# EAGLE board greenhousectrl-latest-expanded (EAGLE 7.7.0)
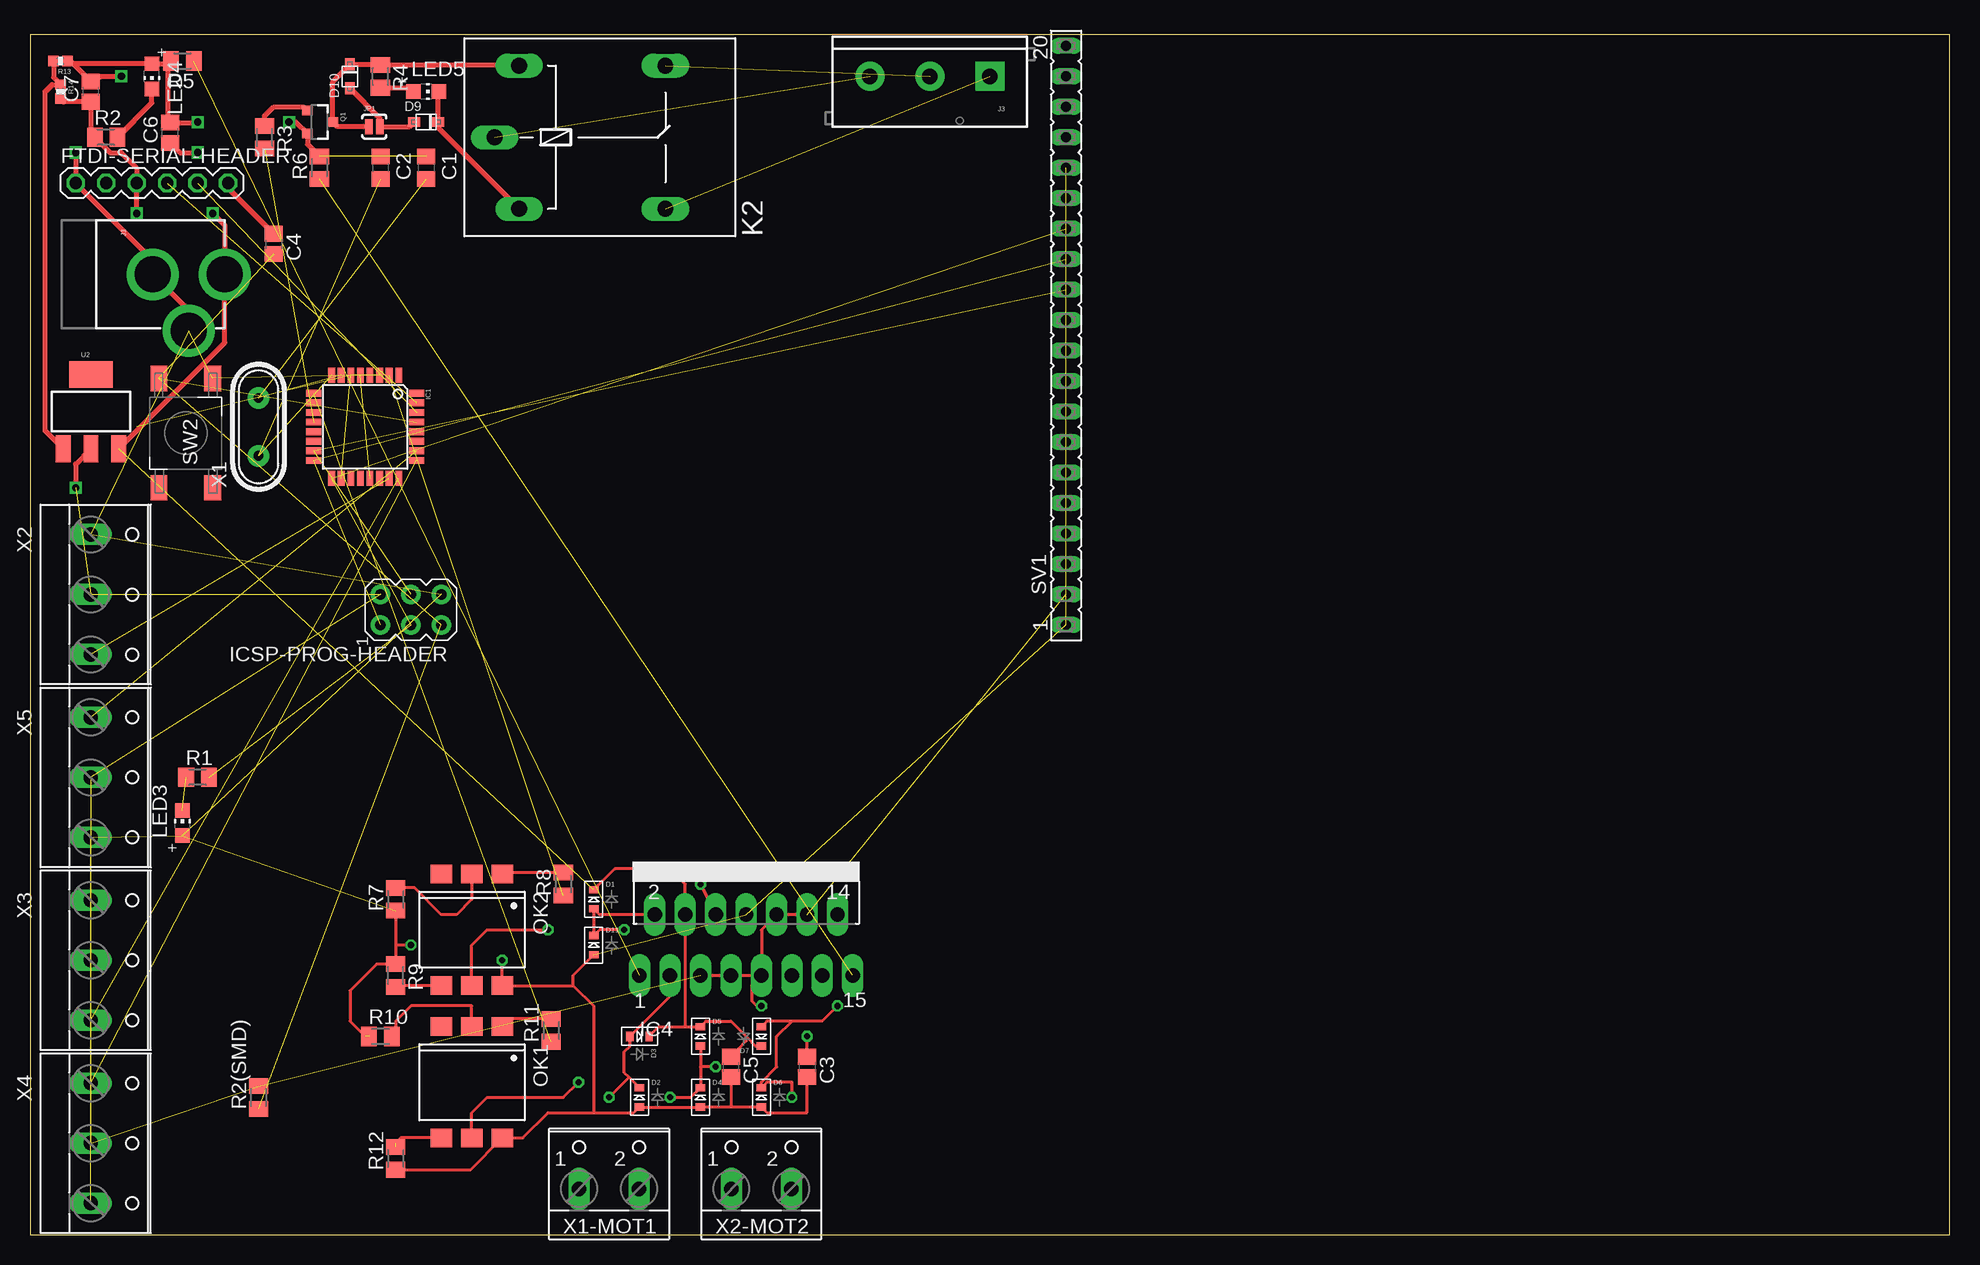
[diagram p0: board, top side]
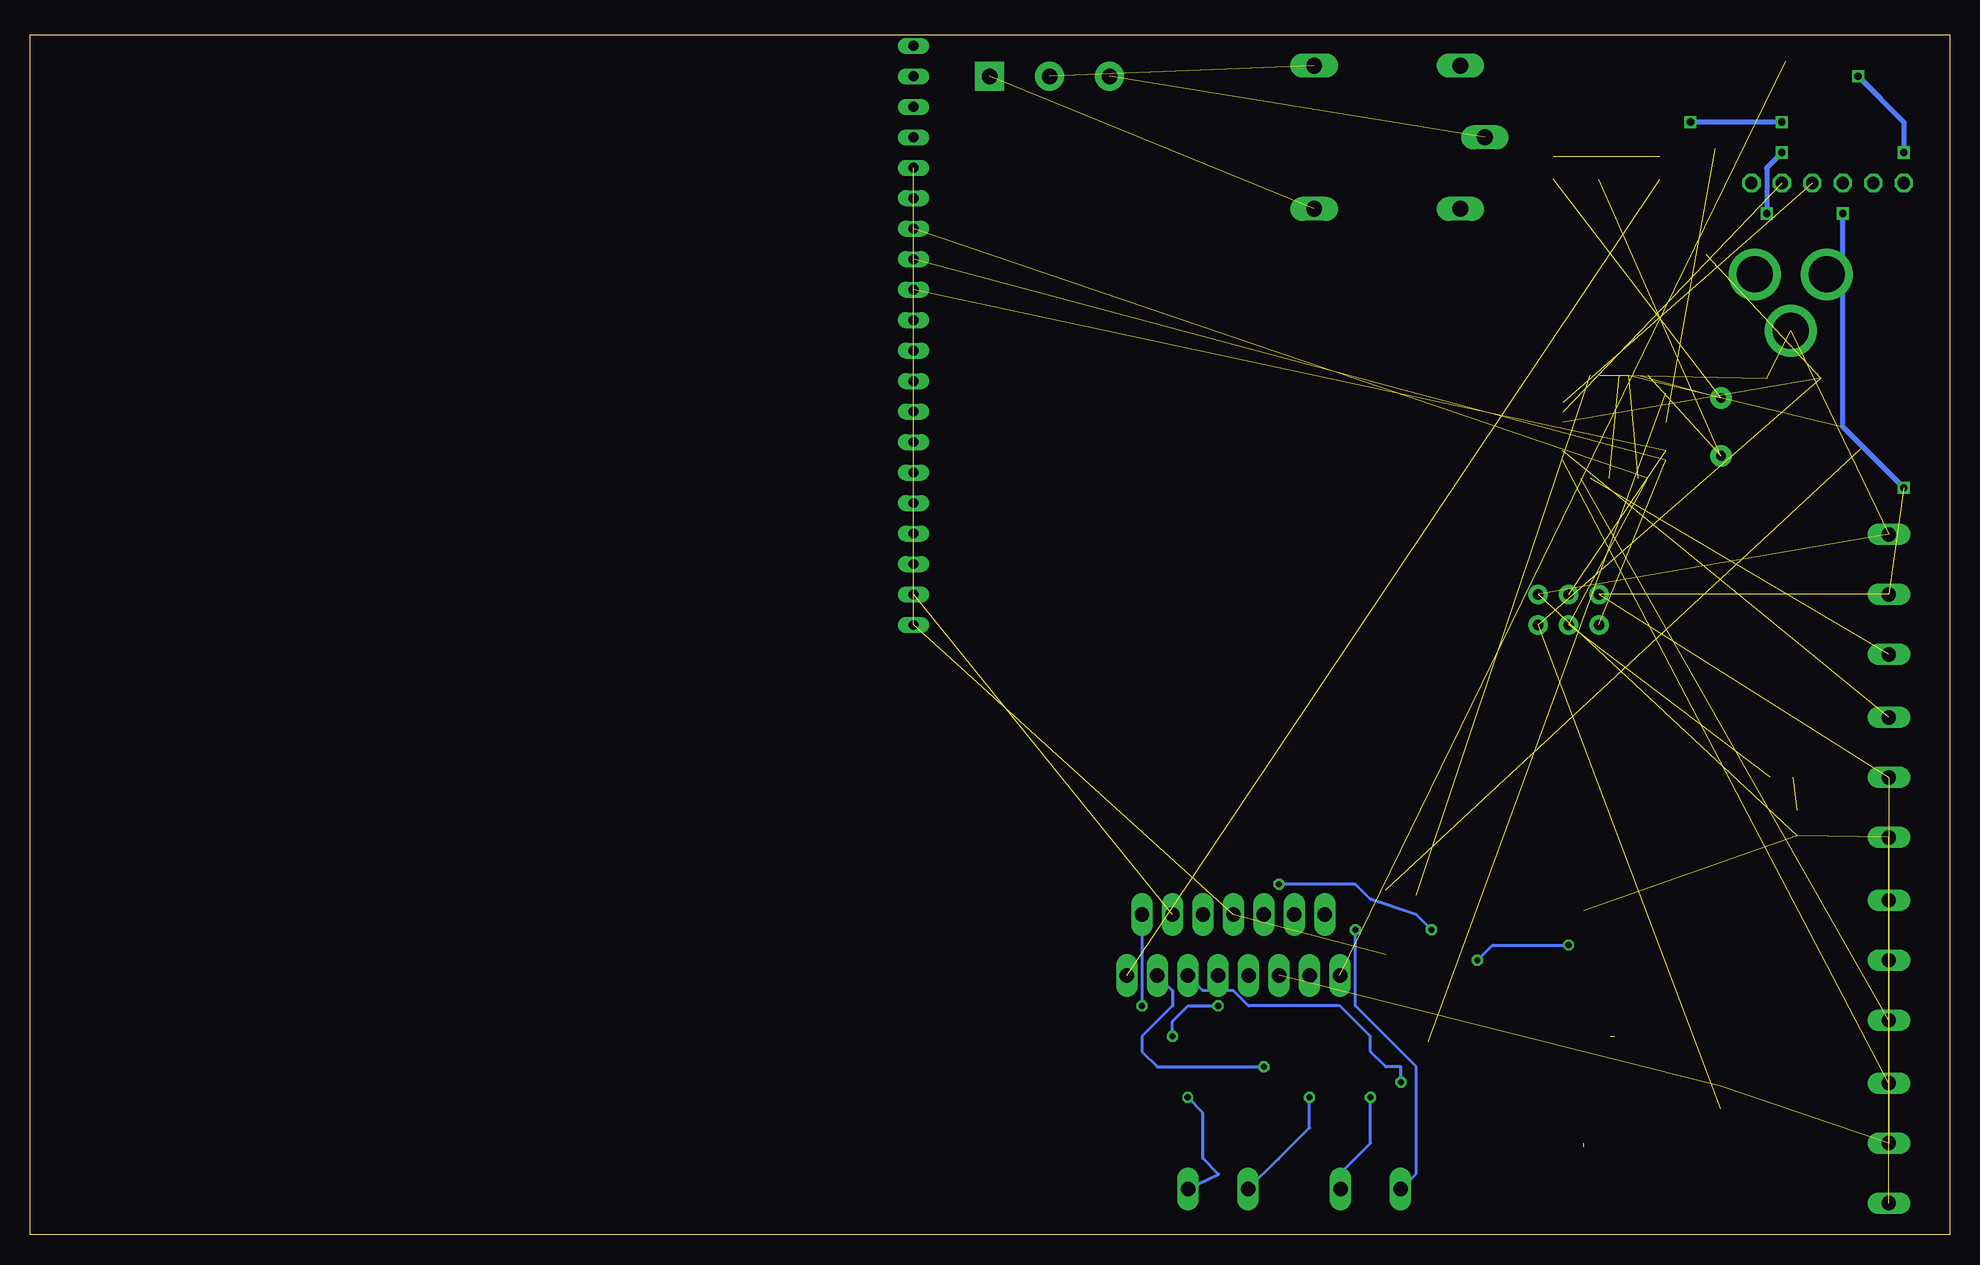
[diagram p1: board, bottom side, seen from below]

Size 160 x 100 mm. Coordinates in mm from the lower left corner, seen from the top.
Outline: 0,0 160,0 160,100 0,100 0,0
Copper layers (1*16): Top 0.035mm / dielectric 1.5mm / Bottom 0.035mm
Design rules "default": minimum track width 10mil, minimum drill 24mil, track to track 8mil, track to pad 8mil, pad to pad 8mil, via to via 8mil, smd to smd 8mil, copper to edge 40mil, drill to drill 8mil, minimum pad ring 10mil, minimum via ring 8mil, stop-mask expansion 4mil, vias tented up to drill 0mil, thermal gap 10mil

## Footprints (pad centres in the part's own frame; a part is rotated, then mirrored left to right if it is on the bottom)
C0805 = smd 1.3 x 1.5: 1 -0.95,0; 2 0.95,0
C0805' = smd 1.3 x 1.5: 1 -0.85,0; 2 0.85,0
SOD-523 = smd 0.8 x 0.6: A 0,-0.8; K 0,0.8
SOD-323F = smd 1 x 0.8: A -1,0; C 1,0
06X1-PTH = drill 1.016 octagon: 1 -6.35,0; 2 -3.81,0; 3 -1.27,0; 4 1.27,0; 5 3.81,0; 6 6.35,0
TQFP32-08 = smd 1.27 x 0.559: 1 -4.293,2.8; 2 -4.293,2; 3 -4.293,1.2; 4 -4.293,0.4; 5 -4.293,-0.4; 6 -4.293,-1.2; 7 -4.293,-2; 8 -4.293,-2.8; 17 4.293,-2.8; 18 4.293,-2; 19 4.293,-1.2; 20 4.293,-0.4; 21 4.293,0.4; 22 4.293,1.2; 23 4.293,2; 24 4.293,2.8 | smd 0.559 x 1.27: 9 -2.8,-4.293; 10 -2,-4.293; 11 -1.2,-4.293; 12 -0.4,-4.293; 13 0.4,-4.293; 14 1.2,-4.293; 15 2,-4.293; 16 2.8,-4.293; 25 2.8,4.293; 26 2,4.293; 27 1.2,4.293; 28 0.4,4.293; 29 -0.4,4.293; 30 -1.2,4.293; 31 -2,4.293; 32 -2.8,4.293
MULTIWATT-15 = drill 1.2 long: 1 -8.89,-7.62; 2 -7.62,-2.54; 3 -6.35,-7.62; 4 -5.08,-2.54; 5 -3.81,-7.62; 6 -2.54,-2.54; 7 -1.27,-7.62; 8 0,-2.54; 9 1.27,-7.62; 10 2.54,-2.54; 11 3.81,-7.62; 12 5.08,-2.54; 13 6.35,-7.62; 14 7.62,-2.54; 15 8.89,-7.62
AVRISP = drill 0.9 pad 1.626: 1 -1.27,2.54; 2 1.27,2.54; 3 -1.27,0; 4 1.27,0; 5 -1.27,-2.54; 6 1.27,-2.54
POWER_JACK_PTH = drill 2.997 pad 4.318: GND 0,7.7; GNDBREAK 4.7,10.7; PWR 0,13.7
SCREWTERMINAL-5MM-3 = drill 1.3 pad 2.413 square: 1 0,0 | drill 1.3 pad 2.413: 2 5,0; 3 10,0
PAD-JUMPER-2-NO_YES_SILK = smd 0.635 x 1.27: 1 -0.45,0; 2 0.45,0
G5LE = drill 1.321 long: 1 -7.493,-5.969; 2 -7.493,5.969; O 4.699,5.969; P -9.525,0; S 4.699,-5.969
CHIP-LED0805 = smd 1.2 x 1.2: A 0,-1.05; C 0,1.05
DIL6-SMD = smd 1.78 x 1.52: 1 -2.54,-4.645; 2 0,-4.645; 3 2.54,-4.645; 4 2.54,4.645; 5 0,4.645; 6 -2.54,4.645
SOT23-3 = smd 0.8 x 0.9: 1 -0.95,-1; 2 0.95,-1; 3 0,1.1
M0805 = smd 1.3 x 1.6: 1 -0.95,0; 2 0.95,0
0402-RES = smd 0.85 x 0.9: 1 -0.58,0; 2 0.58,0
FE20 = drill 0.813 long: 1 -24.13,0; 2 -21.59,0; 3 -19.05,0; 4 -16.51,0; 5 -13.97,0; 6 -11.43,0; 7 -8.89,0; 8 -6.35,0; 9 -3.81,0; 10 -1.27,0; 11 1.27,0; 12 3.81,0; 13 6.35,0; 14 8.89,0; 15 11.43,0; 16 13.97,0; 17 16.51,0; 18 19.05,0; 19 21.59,0; 20 24.13,0
SPST_NO_SMD = smd 2.108 x 1.397: 1 0,4.496; 2 9.119,4.496; 3 0,0; 4 9.119,0
SOT223 = smd 1.219 x 2.235: 1 -2.311,-3.099; 2 0,-3.099; 3 2.311,-3.099 | smd 3.6 x 2.2: 4 0,3.099
HC49 = drill 0.813 pad 1.8: 1 -2.413,0; 2 2.413,0
W237-102 = drill 1.194 long: 1 -2.5,-1.27; 2 2.5,-1.27
W237-103 = drill 1.194 long: 1 -5,-1.29; 2 0,-1.29; 3 5,-1.29

## Placement (x,y rotation side)
C1  [C0805]  33.02,88.9 270 top
C2  [C0805]  29.21,88.9 270 top
C3  1.0uF  [C0805']  64.77,13.97 270 top
C4  0.1uF  [C0805']  20.32,82.55 270 top
C5  1.0uF  [C0805']  58.42,13.97 270 top
C6  0.1uF  [C0805']  11.68,91.82 90 top
C7  0.1uF  [C0805']  5.08,95.25 90 top
D1  [SOD-523]  46.99,27.94 0 top
D2  [SOD-523]  50.8,11.43 0 top
D3  [SOD-523]  50.8,16.51 270 top
D4  [SOD-523]  55.88,11.43 0 top
D5  [SOD-523]  55.88,16.51 0 top
D6  [SOD-523]  60.96,11.43 0 top
D7  [SOD-523]  60.96,16.51 180 top
D9  1N4148  [SOD-323F]  33.02,92.71 0 top
D10  Zener  [SOD-323F]  26.67,96.52 90 top
D11  [SOD-523]  46.99,24.13 0 top
FTDI-SERIAL-HEADER  HEADER-06X1-MALE  [06X1-PTH]  10.16,87.63 0 top
IC1  ATMEGA168TQFP-08  [TQFP32-08]  27.94,67.31 270 top
IC4  L298  [MULTIWATT-15]  59.69,29.21 0 top
ICSP-PROG-HEADER  AVRISP-6  [AVRISP]  31.75,52.07 90 top
J1  POWER_JACKPTH  [POWER_JACK_PTH]  2.54,80.01 270 top
J3  [SCREWTERMINAL-5MM-3]  80.01,96.52 180 top
JP1  JUMPER-PAD-2-NOYES_SILK  [PAD-JUMPER-2-NO_YES_SILK]  28.7,92.33 0 top
K2  G5LE  [G5LE]  48.26,91.44 0 top
LED3  [CHIP-LED0805]  12.7,34.29 0 top
LED4  [CHIP-LED0805]  10.16,96.52 180 top
LED5  [CHIP-LED0805]  33.02,95.25 270 top
OK1  4N27SM  [DIL6-SMD]  36.83,12.7 180 top
OK2  4N27SM  [DIL6-SMD]  36.83,25.4 180 top
Q1  MMBT2222A  [SOT23-3]  24.13,92.71 270 top
R1  [M0805]  13.97,38.1 0 top
R2  [M0805]  6.35,91.44 0 top
R2(SMD)  [M0805]  19.05,11.43 90 top
R3  1K  [M0805]  19.56,91.44 270 top
R4  1K  [M0805]  29.21,96.52 270 top
R5  [M0805]  12.7,97.79 180 top
R6  [M0805]  24.13,88.9 90 top
R7  [M0805]  30.48,27.94 90 top
R8  [M0805]  44.45,29.21 90 top
R9  [M0805]  30.48,21.59 270 top
R10  [M0805]  29.21,16.51 0 top
R11  [M0805]  43.43,17.02 90 top
R12  [M0805]  30.48,6.35 90 top
R13  [0402-RES]  2.54,97.79 180 top
R14  [0402-RES]  2.54,95.25 270 top
SV1  [FE20]  86.36,74.93 90 top
SW2  MOMENTARYBUTTON  [SPST_NO_SMD]  15.24,62.23 90 top
U2  V_REG_317SMD  [SOT223]  5.08,68.58 0 top
X1  CRYSTALS-NOGND-HC49  [HC49]  19.05,67.31 90 top
X1-MOT1  [W237-102]  48.26,5.08 0 top
X2  [W237-103]  6.35,53.34 270 top
X2-MOT2  [W237-102]  60.96,5.08 0 top
X3  [W237-103]  6.35,22.86 270 top
X4  [W237-103]  6.35,7.62 270 top
X5  [W237-103]  6.35,38.1 270 top

## Library data of the parts
C1 C2 = resistor
C3-C7 D1-D7 D10 D11 ICSP-PROG-HEADER LED3-LED5 R1 R2 R2(SMD) R3-R12 = adafruit
D9 = adafruit; PROD_ID: DIO-08378
FTDI-SERIAL-HEADER = GeekAmmo; OTHER: 4UCON 00834; URL: http://www.4uconnector.com/online/SearchPro.asp?FormName=ProSearch&FormAction=search&s_GroupNo=&s_keyword=00834
IC1 = atmega328p
IC4 = st-microelectronics; MPN: L298N; OC_FARNELL: 1589425; OC_NEWARK: 32M1527
J1 = SparkFun-Connectors; PROD_ID: CONN-08197
J3 = SparkFun-Connectors; PROD_ID: CONN-10134; STOREFRONT_ID: PRT-08433
JP1 = SparkFun-Passives
K2 = relay; OC_FARNELL: unknown; OC_NEWARK: unknown
OK1 OK2 = optocoupler; MF: FAIRCHILD SEMICONDUCTOR; MPN: 4N27S-M; OC_FARNELL: unknown; OC_NEWARK: 05C3300
Q1 = SparkFun-DiscreteSemi; PROD_ID: TRANS-08049
R13 R14 = SparkFun-Resistors
SV1 = con-lsta; OC_FARNELL: unknown; OC_NEWARK: unknown
SW2 = ece388
U2 = SparkFun-PowerIC
X1 = IQD-Frequency-Products
X1-MOT1 X2-MOT2 = con-wago-500; MPN: 237-102; OC_FARNELL: unknown; OC_NEWARK: 70K9898
X2-X5 = ece388; MPN: 237-103; OC_FARNELL: unknown; OC_NEWARK: 18M7116

## Nets
+5V: C3.1 C7.1 FTDI-SERIAL-HEADER.3 IC1.4 IC1.6 IC1.18 IC4.5 IC4.7 IC4.9 IC4.10 IC4.12 ICSP-PROG-HEADER.2 R2(SMD).2 R2.1 R14.2 SV1.2 SV1.15 U2.2 X2.2 X3.2 X4.2 X5.2
+12V: C5.1 C6.1 D1.K D3.K D5.K D7.K IC4.4 J1.PWR U2.3
ADC4: SV1.4
ADC5: SV1.5
COIL: D10.C JP1.1 K2.2 Q1.3 R4.1
COMMON: J3.3 K2.P
CTS(DOESNTEXIST): FTDI-SERIAL-HEADER.2
DIODENODE: D9.A D10.A JP1.2
DTR: C4.1 FTDI-SERIAL-HEADER.6
ENA: IC4.6 OK2.5
ENB: IC4.11 OK1.5
GND: C1.1 C2.1 C3.2 C5.2 C6.2 C7.2 D2.A D4.A D6.A D11.A FTDI-SERIAL-HEADER.1 IC1.3 IC1.5 IC1.21 IC4.8 ICSP-PROG-HEADER.6 J1.GND J1.GNDBREAK LED3.A LED4.A OK1.6 OK2.6 Q1.2 R5.2 R6.2 R7.1 R9.1 R10.1 R12.1 R13.1 SV1.1 SV1.3 SV1.16 SW2.4 X2.1 X3.1 X4.3 X5.3
MISO: IC1.16 ICSP-PROG-HEADER.1 SV1.13
MOSI: IC1.15 ICSP-PROG-HEADER.4 SV1.12
N$1: OK2.1 R8.2
N$2: LED4.C R2.2
N$3: LED5.A R4.2
N$4: OK2.2 R7.2
N$5: OK2.4 R9.2
N$6: Q1.1 R3.1
N$7: R13.2 R14.1 U2.1
N$8: OK1.1 R11.2
N$9: OK1.2 R10.2
N$10: LED3.C R1.1
N$11: C1.2 IC1.7 X1.2
N$13: C2.2 IC1.8 X1.1
N$15: OK1.4 R12.2
NC: J3.1 K2.S
NO: J3.2 K2.O
OUT1: D1.A D11.K IC4.2 X1-MOT1.1
OUT2: D2.K D3.A IC4.3 X1-MOT1.2
OUT3: D4.K D5.A IC4.13 X2-MOT2.1
OUT4: D6.K D7.A IC4.14 X2-MOT2.2
PB0: IC1.12 R3.2
PB1: IC1.13
PB2: IC1.14
PC0: IC1.23 X2.3
PC1: IC1.24 X3.3
PC2: IC1.25 X4.1
PC3: IC1.26 X5.1
PC4: IC1.27
PC5: IC1.28
PD2: IC1.32
PD3: IC1.1
PD4: IC1.2 R8.1
PD5: IC1.9 R11.1
PD6: IC1.10
PD7: IC1.11
RST: C4.2 IC1.29 ICSP-PROG-HEADER.5 R2(SMD).1 SW2.2
RX: FTDI-SERIAL-HEADER.5 IC1.30
SCK: IC1.17 ICSP-PROG-HEADER.3 R1.2 SV1.14
SEN_A: IC4.1 R5.1
SEN_B: IC4.15 R6.1
SS: SV1.11
TX: FTDI-SERIAL-HEADER.4 IC1.31
VCC: D9.C K2.1 LED5.C

## Tracks (layer width: path | path; a pad name or v marks a point on that pad's centre or on a via)
+5V  (via drill 0.51, 0.6)  (12 unrouted)
  Top 0.254: C3.1 v64.77,16.51 | v60.96,19.05 60.58,19.05 60.2,19.43 60.2,20.83 IC4.9 | IC4.9 60.96,25.4 IC4.10 IC4.12 | IC4.9 IC4.7 IC4.5
  Top 0.406: R14.2 2.81,94.4 C7.1 5.08,91.76 R2.1 6.67,90.17 7.62,90.17 8.89,88.9 FTDI-SERIAL-HEADER.3 v8.89,85.09 | U2.2 3.81,64.21 v3.81,62.23
  Bottom 0.254: v64.77,16.51 64.77,17.78 63.5,19.05 v60.96,19.05
  Bottom 0.406: v3.81,62.23 8.89,67.31 v8.89,85.09
+12V  (via drill 0.6)  (1 unrouted)
  Top 0.254: D1.K 48.73,30.48 53.34,30.48 54.61,29.21 IC4.4 54.61,17.31 | D3.K 52.4,17.31 54.61,17.31 | 54.61,17.31 D5.K 56.35,17.78 58.42,17.78 59.69,16.51 | 59.69,16.51 60.49,15.71 D7.K | C5.1 59.69,16.14 59.69,16.51
  Top 0.406: C6.1 12.48,90.17 v13.97,90.17 | v15.24,85.09 16.24,84.09 J1.PWR 16.24,74.33 U2.3
  Bottom 0.406: v13.97,90.17 15.24,88.9 v15.24,85.09
COIL
  Top 0.406: K2.2 40.71,97.47 R4.1 29.16,97.52 D10.C 25.23,96.08 Q1.3 25.61,92.33 JP1.1
COMMON  (1 unrouted)
DIODENODE
  Top 0.406: D9.A 31.64,92.33 JP1.2 29.15,93.04 D10.A
DTR
  Top 0.406: C4.1 16.51,87.21 FTDI-SERIAL-HEADER.6
ENA  (via drill 0.51)
  Top 0.254: OK2.5 36.83,24.13 38.1,25.4 v43.18,25.4 | v55.88,29.21 IC4.6
  Bottom 0.254: v43.18,25.4 44.45,26.67 48.26,27.94 49.53,29.21 v55.88,29.21
ENB  (via drill 0.51)
  Top 0.254: OK1.5 36.83,10.16 38.1,11.43 44.45,11.43 v45.72,12.7
  Bottom 0.254: v45.72,12.7 45.72,13.97 46.99,13.97 48.26,15.24 48.26,16.51 50.8,19.05 58.42,19.05 59.69,20.32 62.23,20.32 IC4.11
GND  (via drill 0.51, 0.6)  (18 unrouted)
  Top 0.254: R7.1 30.48,24.13 | 30.48,24.13 R9.1 28.89,22.54 26.67,20.32 26.67,17.78 27.94,16.51 | 58.42,10.63 D6.A 61.43,10.16 64.77,10.16 C3.2 | 58.42,10.63 D4.A D2.A 50.33,10.16 46.99,10.16 | R12.1 36.72,5.4 OK1.6 41.08,8.05 43.18,10.16 46.99,10.16 | 45.28,20.75 OK2.6 v39.37,22.86 | 45.28,20.75 46.99,19.05 46.99,10.16 | 45.28,20.75 45.28,21.62 D11.A | C5.2 58.42,10.63 | v31.75,24.13 30.48,24.13
  Top 0.406: R13.1 3.39,97.79 3.61,97.57 | 3.61,97.57 C7.2 5.93,96.52 v7.62,96.52 | 11.53,97.57 LED4.A 3.61,97.57 | R6.2 23.13,90.85 Q1.2 22.18,92.71 v21.59,92.71 | v13.97,92.71 13.93,92.67 C6.2 11.53,93.03 11.53,97.57 | 11.53,97.57 R5.2 | v3.81,90.17 FTDI-SERIAL-HEADER.1 10.24,81.2 J1.GND 13.24,77.01 J1.GNDBREAK
  Bottom 0.254: v39.37,22.86 38.1,24.13 v31.75,24.13
  Bottom 0.406: v13.97,92.71 v21.59,92.71 | v7.62,96.52 3.81,92.71 v3.81,90.17
MISO  (2 unrouted)
MOSI  (2 unrouted)
N$1
  Top 0.254: R8.2 39.48,30.16 OK2.1
N$2
  Top 0.406: R2.2 10.16,94.3 LED4.C
N$3
  Top 0.406: R4.2 31.65,95.57 LED5.A
N$4
  Top 0.254: OK2.2 36.83,27.94 35.56,26.67 34.29,26.67 32.07,28.89 R7.2
N$5
  Top 0.254: OK2.4 30.59,20.75 R9.2
N$6
  Top 0.406: R3.1 19.56,93.22 20.32,93.98 22.81,93.98 Q1.1
N$7
  Top 0.406: R13.2 1.96,96.41 R14.1 1.85,95.83 1.27,95.25 1.27,66.98 U2.1
N$8
  Top 0.254: R11.2 39.99,17.97 OK1.1
N$9
  Top 0.254: OK1.2 36.83,19.05 31.75,19.05 30.48,17.78 30.48,16.83 R10.2
N$10  (1 unrouted)
N$11  (2 unrouted)
N$13  (2 unrouted)
N$15  (1 unrouted)
  Top 0.254: OK1.4 30.91,8.05 30.48,7.62
NC  (1 unrouted)
NO  (1 unrouted)
OUT1  (via drill 0.51)
  Top 0.254: IC4.2 47.46,26.67 D1.A D11.K 47.46,25.4 v49.53,25.4
  Bottom 0.254: X1-MOT1.1 45.72,3.81 44.45,5.08 44.45,13.97 49.53,19.05 v49.53,25.4
OUT2  (via drill 0.51)
  Top 0.254: IC4.3 53.34,19.85 D3.A 50,15.71 49.53,15.24 49.53,13.5 49.93,13.1 | D2.K 49.93,13.1 | v48.26,11.43 49.93,13.1
  Bottom 0.254: X1-MOT1.2 50.76,5.12 48.26,7.62 v48.26,11.43
OUT3  (via drill 0.51)
  Top 0.254: D5.A 55.88,13.97 | 55.88,13.97 D4.K 55.08,11.43 v53.34,11.43 | v57.15,13.97 55.88,13.97
  Bottom 0.254: X2-MOT2.1 55.92,6.31 53.34,8.89 v53.34,11.43 | IC4.13 64.77,20.32 64.77,19.05 67.31,16.51 67.31,15.24 66.04,13.97 v57.15,13.97
OUT4  (via drill 0.51)
  Top 0.254: v67.31,19.05 66.04,17.78 63.5,17.78 | 63.5,17.78 61.43,17.78 D7.A | 63.5,17.78 62.23,16.51 62.23,13.97 60.96,12.7 D6.K 61.43,12.7 63.5,12.7 v63.5,11.43
  Bottom 0.254: IC4.14 v67.31,19.05 | X2-MOT2.2 60.92,5.04 62.23,6.35 62.23,10.16 v63.5,11.43
PB0  (1 unrouted)
PC0  (1 unrouted)
PC1  (1 unrouted)
PC2  (1 unrouted)
PC3  (1 unrouted)
PD4  (1 unrouted)
PD5  (1 unrouted)
RST  (4 unrouted)
RX  (1 unrouted)
SCK  (3 unrouted)
SEN_A  (1 unrouted)
SEN_B  (1 unrouted)
TX  (1 unrouted)
VCC
  Top 0.406: K2.1 34.02,92.22 D9.C 34.02,95.2 LED5.C